# Altium PCB ET4207_DEMO.PcbDoc
Units mil, origin at the board's own origin, x right, y up, seen from the top; angles counter-clockwise.
Board outline 1908.53 x 1807.98 mil, 2 copper layers (Top Layer, Bottom Layer); 46 components, 26 nets, 115 pads, 21 vias.
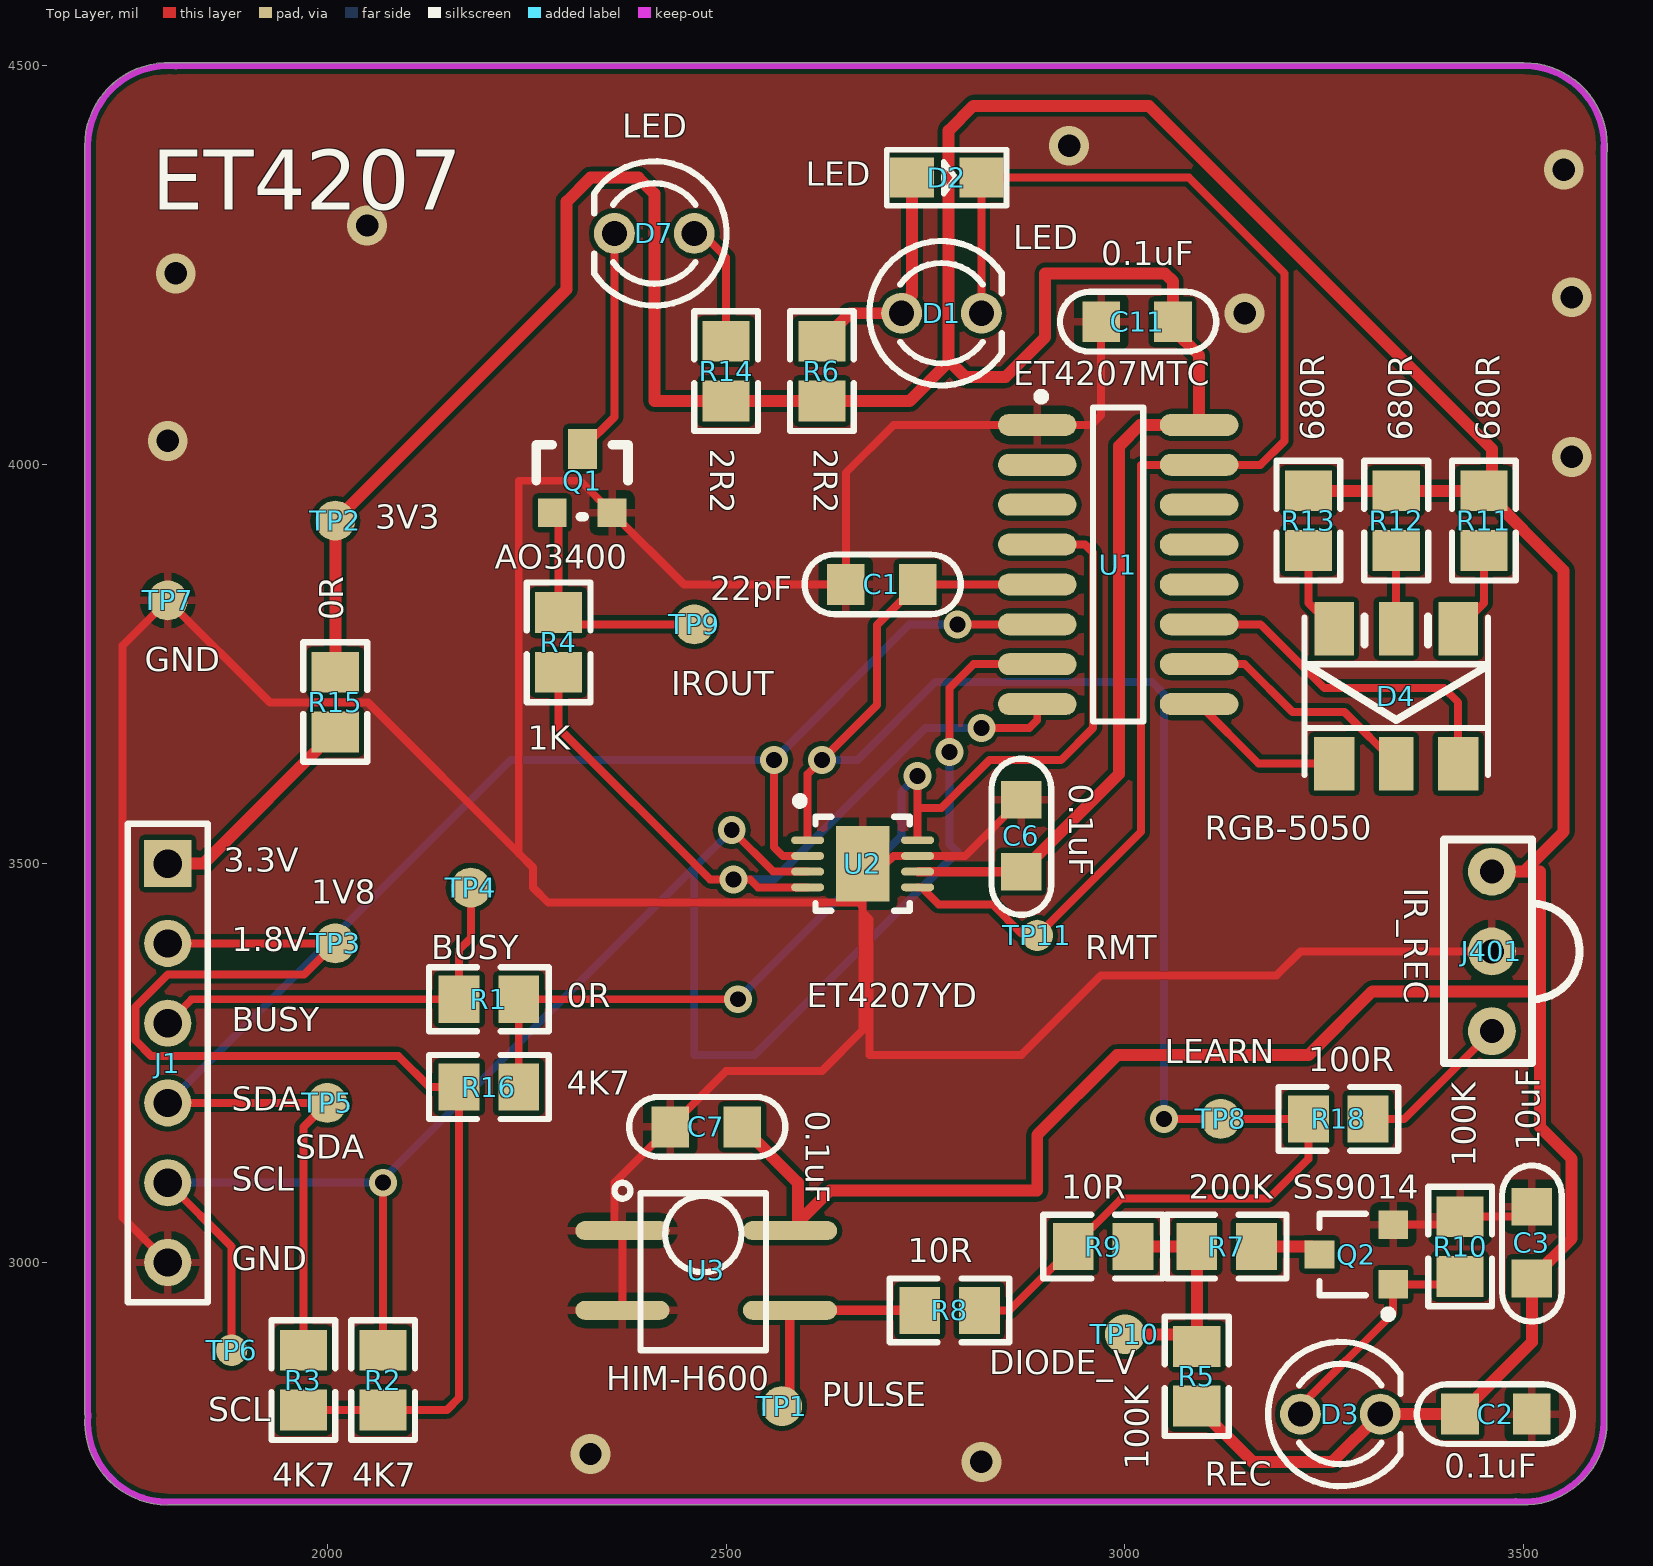
[diagram p0: Top Layer view]
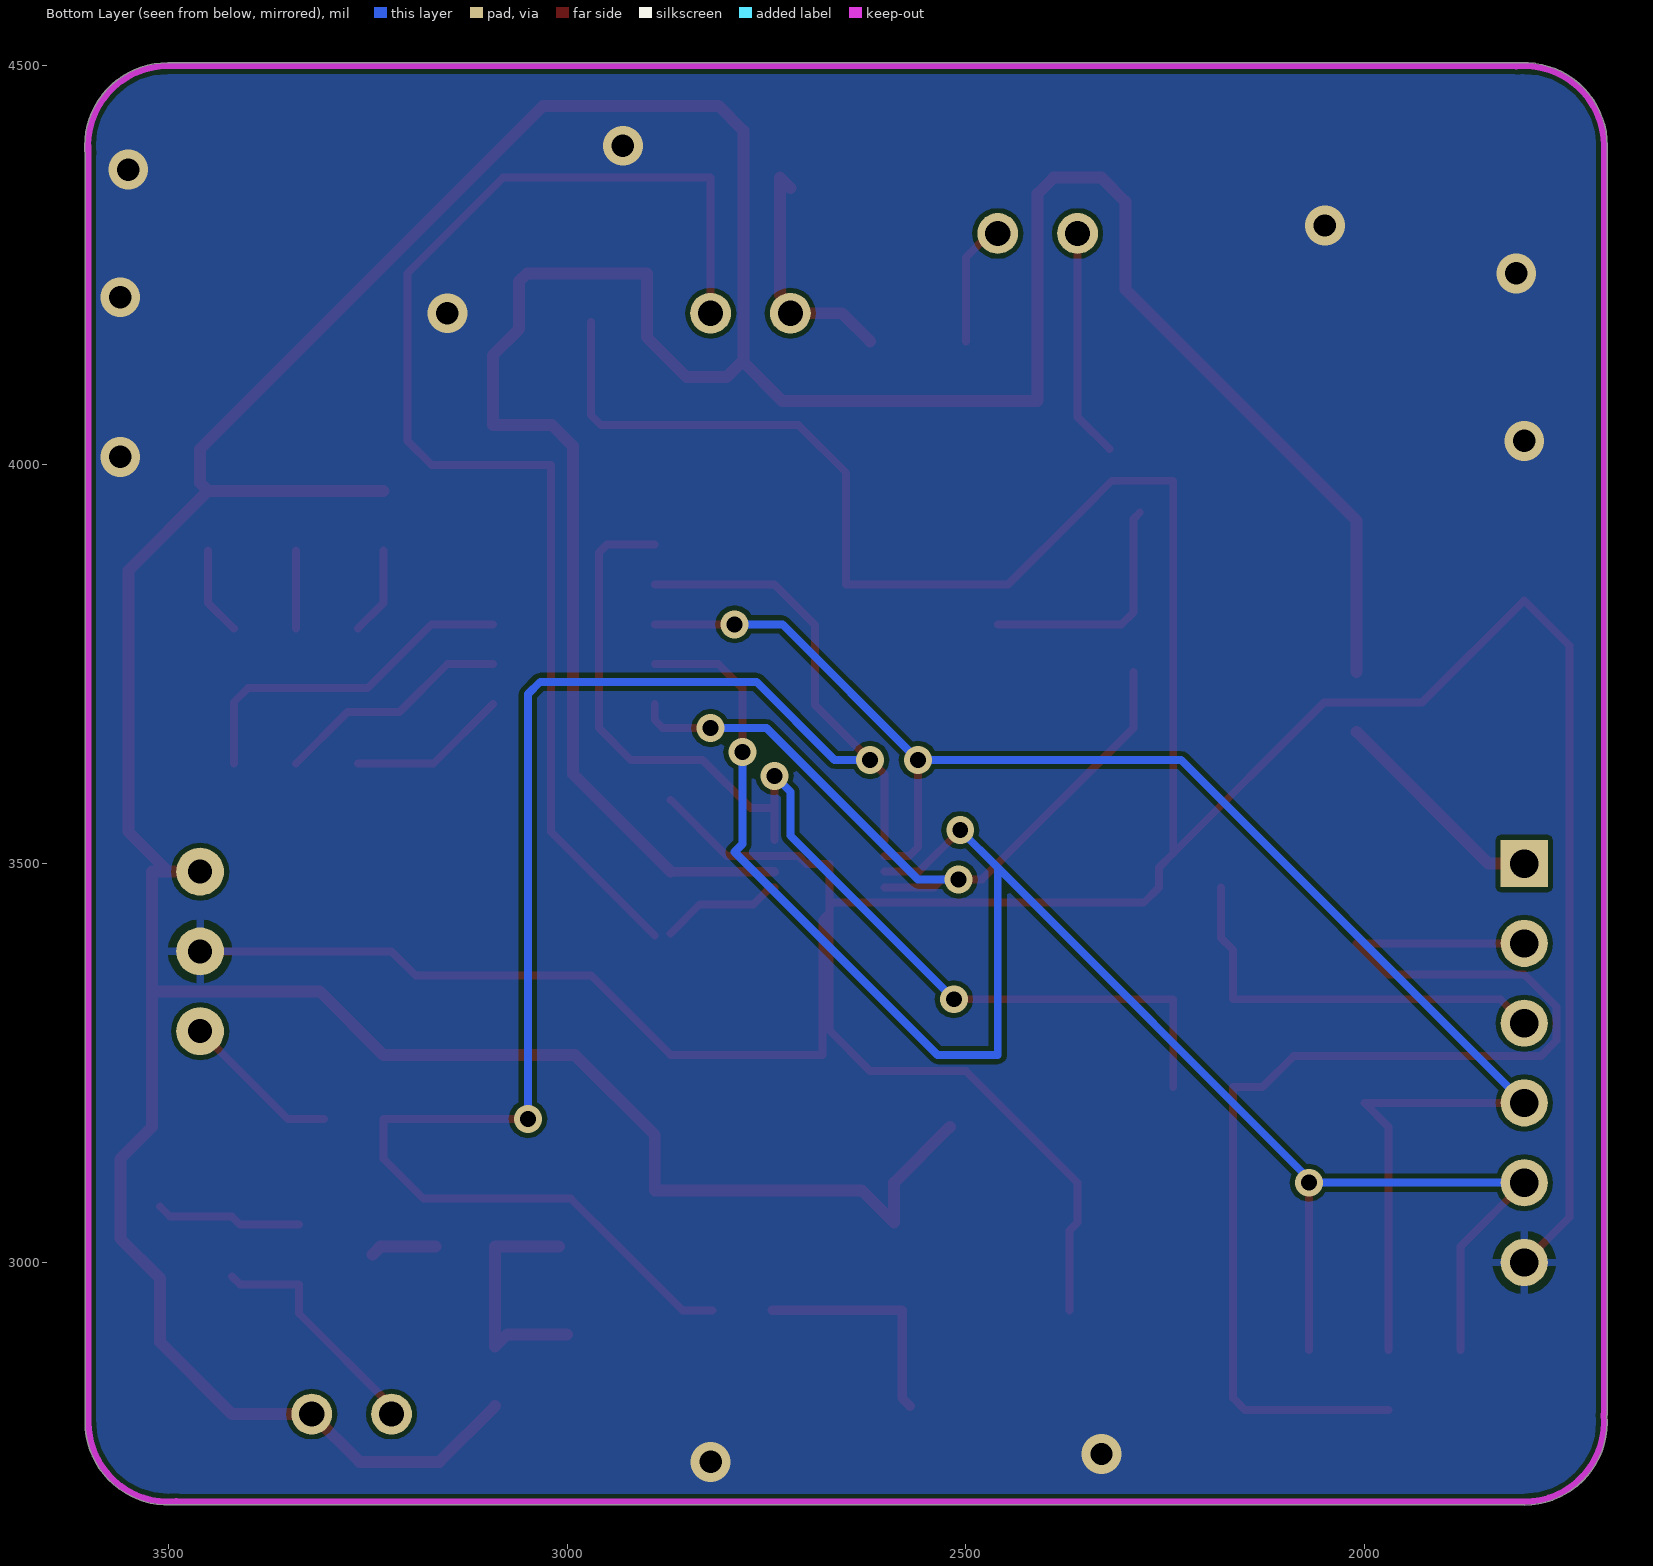
[diagram p1: Bottom Layer view, seen from below]
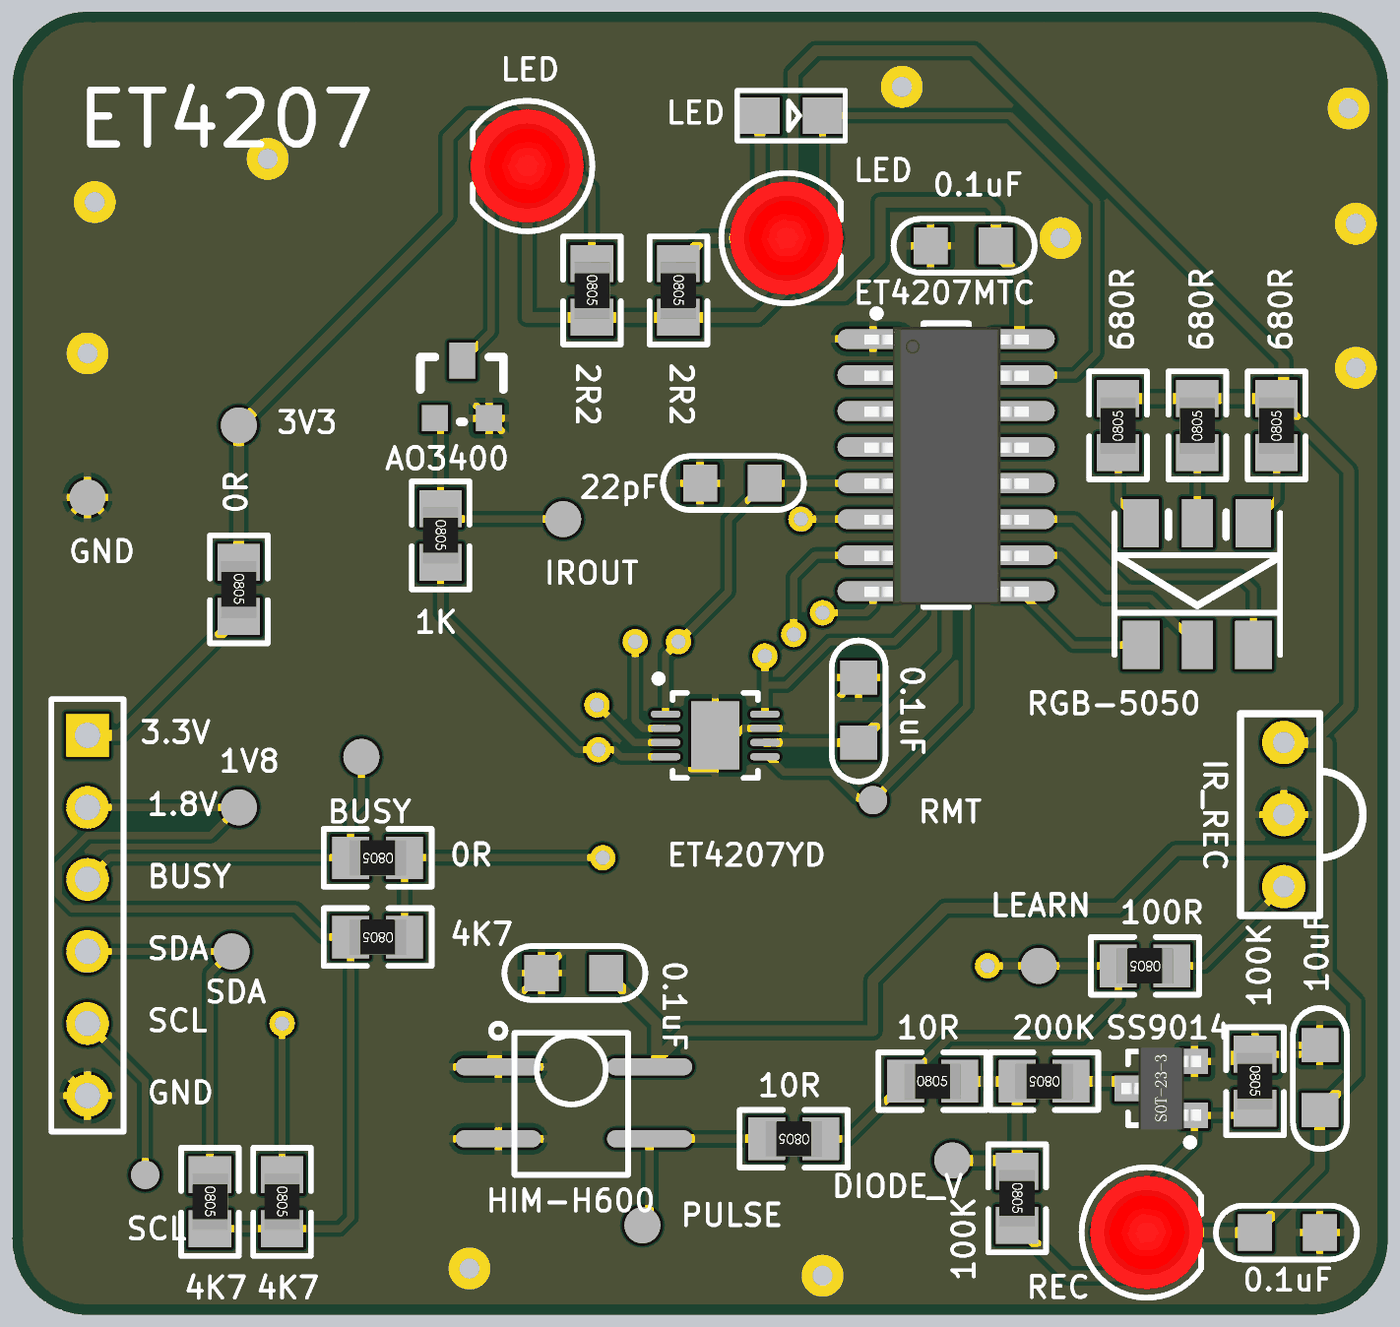
[diagram p2: 3D render of the assembled board from above, using the file's embedded part models]

## Layer stack, top to bottom
Top Solder: solder mask 0.4, Solder Resist, Dk 3.5
Top Layer: signal copper 1.4
Dielectric 1: dielectric 12.6, FR-4, Dk 4.8
Bottom Layer: signal copper 1.4
Bottom Solder: solder mask 0.4, Solder Resist, Dk 3.5

## Board outline
1800,2695.99 cw(c1800,2800) 1696.33,2808.52 cw(c1700,2810) 1696.05,2810 1696.05,4399.29 cw(c1700,4400) 1695.98,4400 cw(c1800,4400) 1803.62,4503.95 3500,4503.95 cw(c3500,4500) 3500.14,4503.95 cw(c3500.5,4499.95) 3500.5,4503.97 cw(c3500.5,4399.95) 3604.51,4399.95 cw(c3500.5,4399.95) 3604,4389.6 cw(c3600,4390) 3603.95,4389.29 3603.95,2800.71 cw(c3600,2800) 3604.01,2800 cw(c3500,2800) 3496.38,2696.05 1800.71,2696.05 cw(c1800,2700)

## Design rules (kind name [scope] priority, off if disabled: settings)
Clearance [All] p1: gap=6 ignorepadtopadclearanceinfootprint=FALSE
PolygonConnect [All] p1: connectstyle=Relief reliefconductorwidth=10 reliefentries=4 polygonreliefangle="90 Angle" airgapwidth=10
RoutingVias [All] p1: holewidth=20 width=35 viastyle="Through Hole" minholewidth=15 minwidth=25 maxholewidth=28 maxwidth=50
SolderMaskExpansion [All] p1: expansion=4
Width [All] p1: maxlimit=40 minlimit=6 preferedwidth=10
30 further rules are at their usual default settings.

## Components (designator, comment, footprint, x,y, rotation, side; value= is the part's Value field where it differs from the comment)
C1 "22pF" 0805C 2739.86,3850.73 r90 top
C2 "0.1uF" 0805C 3420.14,2809.27 r270 top
C3 "10uF" 0805C 3510.73,2980.14 r0 top
C6 "0.1uF" 0805C 2870.73,3490.14 r0 top
C7 "0.1uF" 0805C 2519.86,3170.73 r90 top
C11 "0.1uF" 0805C 3060,4180 r90 top
D1 "LED" LED_A2 2770,4190 r180 top
D2 "LED" LED-0805 2733.97,4360.41 r0 top
D3 "REC" LED_A2 3270,2810 r180 top
D4 "RGB-5050" LED-5050 3340,3710 r270 top
D7 "LED" LED_A2 2410,4290 r0 top
J1 "CON6" HDR1X6 1800,3500 r270 top
J401 "IR_REC" IR 3460,3290 r90 top
Q1 "AO3400" SOT-23 2312,3980 r0 top
Q2 "SS9014" SOT23-3 3290,3010 r90 top
R1 "0R" 0805R 2202.6,3330 r180 top
R2 "4K7" 0805R 2070,2852.6 r270 top
R3 "4K7" 0805R 1970,2852.6 r270 top
R4 "1K" 0805R 2290,3777.4 r270 top
R5 "100K" 0805R 3090,2857.4 r270 top
R6 "2R2" 0805R 2620,4117.4 r270 top
R7 "200K" 0805R 3127.4,3020 r180 top
R8 "10R" 0805R 2780,2940 r180 top
R9 "10R" 0805R 2972.6,3020 r0 top
R10 "100K" 0805R 3420,3020 r270 top
R11 "680R" 0805R 3450,3930 r90 top
R12 "680R" 0805R 3340,3930 r90 top
R13 "680R" 0805R 3230,3930 r90 top
R14 "2R2" 0805R 2500,4117.4 r270 top
R15 "0R" 0805R 2010,3702.6 r270 top
R16 "4K7" 0805R 2202.6,3220 r180 top
R18 "100R" 0805R 3267.4,3180 r180 top
TP1 "PULSE" TP-SM-C-100#1 2570,2820 r0 top
TP2 "3V3" TP-SM-C-100#1 2010,3930 r90 top
TP3 "1V8" TP-SM-C-100#1 2010,3400 r90 top
TP4 "BUSY" TP-SM-C-100#1 2180,3470 r90 top
TP5 "SDA" TP-SM-C-100#1 2000,3200 r90 top
TP6 "SCL" TP-SM-C-100#2 1880,2890 r90 top
TP7 "GND" TP-SM-C-100#1 1800,3830 r90 top
TP8 "LEARN" TP-SM-C-100#1 3120,3180 r90 top
TP9 "IROUT" TP-SM-C-100#1 2460,3800 r90 top
TP10 "DIODE_V" TP-SM-C-100#1 3000,2910 r90 top
TP11 "RMT" TP-SM-C-100#2 2890,3410 r90 top
U1 "ET4207MTC" soic-16 2991.46,3875 r0 top
U2 "ET4207YD" QFN-8 2671.1,3499.84 r0 top
U3 "HIM-H600" HIM-H600 2550,2890 r90 top

## Footprints (in the part's own frame and the unit in brackets; to place one, negate y for a bottom-side part, rotate by r counter-clockwise, add the part's x,y. Pads: shape width x height; smd on the part's side, far side on the other; paste and mask are expansions set on the pad)
0805C [mm]
  rect 1.3x1.2 smd: 1(-0.019,-0.004) 2(-0.019,2.282)
  silkscreen extent -0.97,-1.38 0.93,3.59
0805R [mm] "0805带丝印"
  rect 1.3x1.5 smd: 1(-0.95,0) 2(0.95,0)
  silkscreen extent -1.9,-1.02 1.91,1.02, body extent -1,-0.62 1,0.63, height 0.5
HDR1X6 [mm] "Connector; Header; 6 Position"
  rect 1.5x1.5 hole 0.9: 1(0,0)
  round 1.5 hole 0.9: 2(2.54,0) 3(5.08,0) 4(7.62,0) 5(10.16,0) 6(12.7,0)
  silkscreen extent -1.27,-1.27 13.97,1.27
HIM-H600 [mm]
  oval 0.6x3 smd: 1(3.81,4.572) 2(1.27,4.572) 3(1.27,-0.762) 4(3.81,-0.762)
  silkscreen extent 0,0 5.33,4.83
IR [mil]
  round 60 hole 30: 1(0,0) 2(100,0) 3(200,0)
  silkscreen extent -40,-110 240,60
LED-0805 [mm]
  rect 1.4x1.27 smd: 1(-0.025,-0.01) 2(2.185,-0.01)
  silkscreen extent -0.82,-0.9 2.99,0.88
LED-5050 [mm]
  rect 1.7x1.25 smd: 1(-2.15,1.975) 5(-2.15,-1.975)
  rect 1.7x1.3 smd: 2(2.15,1.975) 6(2.15,-1.975)
  rect 1.7x1.1 smd: 3(-2.15,0) 4(2.15,0)
  silkscreen extent -2.54,-2.92 2.5,2.92
LED_A2 [mm] "直径3MM LED"
  round 1.3 hole 0.8: 1(1.27,0) 2(-1.27,0)
  silkscreen extent -1.91,-2.3 2.3,2.3, body extent -2,-2 2,2, height 4.5
QFN-8 [mm] "QFN"
  oval 1.05x0.25 smd: 1(-1.75,0.75) 2(-1.75,0.25) 3(-1.75,-0.25) 4(-1.75,-0.75) 5(1.75,-0.75) 6(1.75,-0.25) 7(1.75,0.25) 8(1.75,0.75)
  rect 1.7x2.4 smd: 9(0,0)
  silkscreen extent -2.12,-1.5 1.5,2.12
soic-16 [mm]
  oval 2.5x0.7 smd: 1(-2.577,4.445) 2(-2.577,3.175) 3(-2.577,1.905) 4(-2.577,0.635) 5(-2.577,-0.635) 6(-2.577,-1.905) 7(-2.577,-3.175) 8(-2.577,-4.445) 9(2.577,-4.445) 10(2.577,-3.175) 11(2.577,-1.905) 12(2.577,-0.635) 13(2.577,0.635) 14(2.577,1.905) 15(2.577,3.175) 16(2.577,4.445)
  silkscreen extent -2.57,-5 0.8,5.47, body extent -2.88,-4.92 2.92,4.88, height 1.75
SOT23-3 [mm]
  rect 0.9x0.95 smd: 1(-0.95,-1.175) 2(0.95,-1.175) 3(0,1.175)
  silkscreen extent -2.03,-1.14 1.3,1.18, body extent -1.45,-1.4 1.45,1.4, height 1.2
SOT-23 [mil]
  rect 36x36 smd: 1(-30,-40) 2(45,-40)
  rect 36x50 smd: 3(8,40)
  silkscreen extent -50,-45 65,45
TP-SM-C-100#1 [mil] "Test Point, Surface Mounting, Circular, Pad Diameter 1mm"
  round 50 smd: 1(0,0)
TP-SM-C-100#2 [mil] "Test Point, Surface Mounting, Circular, Pad Diameter 1mm"
  round 39.37 smd: 1(0,0)

## Part data
C1 C2 C3 C6 C7 C11: library part "CAPACITOR NON-POL"
D1 D2 D3 D7: library part LED_3
D4: library part LED-RGB-5050, "三基色LED", LatestRevisionDate=08-Jul-2005, LatestRevisionNote="Mech Layer 1 removed.", PackageReference=LED-0, Published=8-Jun-2000, Publisher="Altium Limited"
J401: library part CON3_0
Q1: library part MOSFET_I_EN_GSD, "MOSFET N-CH 50V 200MA SOT-23", Mfr_Name="On Semi", Mfr_Part_Number=BSS138LT3G, Datasheet=http://www.onsemi.com/pub_link/Collateral/BSS138LT1-D.PDF, Distributor_Part_Number=BSS138LT3GOSCT-ND, TI_Part_No=TI-MOS-BSS138LT3G
Q2: "NPN贴片三极管", PackageDocument=Sep-1998, Code_JEDEC=TO-92A, ComponentLink1Description="Manufacturer Link", ComponentLink1URL=http://www.fairchildsemi.com/, ComponentLink2Description=Datasheet, ComponentLink2URL=http://www.fairchildsemi.com/ds/2N%2F2N3904.pdf, DatasheetDocument=1997, LatestRevisionDate=15-Jan-2003, LatestRevisionNote="PCB Footprint 'BCY-W3/D4.7' replaced", PackageReference=TO-92A, Published=8-Jun-2000, Publisher="Altium Limited"
R1 R2 R3 R4 R5 R6 R7 R8 R9 R10 R11 R12 R13 R14 R15 R16 R18: library part RESISTOR, MODULE=CPU
TP1 TP2 TP3 TP4 TP5 TP6 TP7 TP8 TP9 TP10 TP11: library part TP-SM, "Test Point, Surface Mount, Circular, Pad Diameter 1 mm"
U3: library part LPC111x_7, DEVICE=ET4003YD, MODULE=CPU

## Via types
v1: diameter 35, hole 20, Top Layer to Bottom Layer, 11 vias
v2: diameter 50, hole 28, Top Layer to Bottom Layer, 10 vias

## Nets (pads, with @x,y where several pads share a name; then routed paths per layer and width w, separated by ;. In a path a pad name is that pad's centre, name@x,y a point inside that pad or via, vN(x,y) a via of type N, cw(c..) or ccw(c..) an arc to the next point about the centre after c; other vN are vias at no path point)
BUSY: R1.1 R16.1 U1.4 U2.8 | length 1394.5
  Top Layer w10: R16.1 R1.1 v1(2515,3330) ; U2.8 2740,3569.68 ; v1(2740,3610) 2740,3569.68 ; U1.4 2950,3900 2960,3890 2960,3670 2920,3630 2830,3630 2769.68,3569.68 2740,3569.68
  Bottom Layer w10: v1(2515,3330) 2720,3535 2720,3590 v1(2740,3610)
BUSY_OUT: J1.3 R1.2 TP4.1 | length 523.8
  Top Layer w10: J1.3 1830,3330 R1.2 2165.2,3392 2180,3406.8 TP4.1
GND: C1.2 C2.2 C3.2 C6.2 C7.2 C11.2 J1.6 J401.2 Q1.2 Q2.2 R10.1 TP7.1 U1.1 U2.7 U2.9 U3.1 U3.2 | length 5654
  Top Layer w10: J1.6 1743.47,3056.53 1743.47,3773.47 TP7.1 1928,3702 2051,3702 2240,3513 ; U3.2 U3.1 2360,3050 2360,3100 C7.2 2500,3240 2620,3240 2671.1,3291.1 2671.1,3438.9 ; C6.2 2799.69,3509.69 U2.7 2709.84,3509.69 2700,3499.84 U2.9 2671.1,3446.4 ; C11.2 2970.14,4062.5 2957.64,4050 U1.1 2710,4050 2650,3990 C1.2 2447,3850 Q1.2 2317,3980 2240,3980 2240,3513 ; Q2.2 3410,3047.4 R10.1 3497.4,3057.4 C3.2 ; J401.2 3220,3390 3190,3360 2970,3360 2870,3260 2680,3260 2680,3430 2671.1,3438.9 ; 2240,3513 2258,3495 2258,3470 2277,3451 2666.5,3451 2671.1,3446.4 ; 2671.1,3438.9 2671.1,3446.4
  other v2: 2820,2750 2330,2760 3560,4010 1800,4030 3150,4190 3560,4210 1810,4240 2050,4300 3550,4370 2930,4400
IROUT: R4.2 U1.8 U2.4 | length 948.8
  Top Layer w10: R4.2 2290,3670 2480,3480 v1(2509,3480) 2530.31,3480 2540,3470.31 U2.4 ; v1(2820,3670) 2880,3670 2890,3680 U1.8
  Bottom Layer w10: v1(2509,3480) 2560,3480 2750,3670 v1(2820,3670)
LEARN: C1.1 R8.1 R9.1 R18.2 TP8.1 U1.5 U2.1 | length 2258.5
  Top Layer w10: U2.1 2602.2,3612.2 v1(2620,3630) 2689,3699 2689,3799 C1.1 U1.5 ; R8.1 2855.2,2940 R9.1 2995.2,3080 3180,3080 3230,3130 R18.2 TP8.1 v1(3049,3180)
  Bottom Layer w10: v1(2620,3630) 2664.5,3630 2762.5,3728 3033.5,3728 3049,3712.5 v1(3049,3180)
LED_B: D4.6 U1.9 | length 200.2
  Top Layer w10: U1.9 3167.56,3625.35 D4.6
LED_G: D4.4 U1.10 | length 298.7
  Top Layer w10: U1.10 3150,3750 3210,3690 3275.35,3690 D4.4
LED_R: D4.2 U1.11 | length 442.2
  Top Layer w10: U1.11 3170,3800 3250,3720 3400,3720 3417.76,3702.24 D4.2
NetD1_1: D1.1 D2.1 R6.1 | length 312.5
  Top Layer w15: R6.1 2655.2,4190 D1.1@2710,4190 ; D1.1 D1.1@2710,4190 ; D2.1@2720,4347.01 D2.1 2732.99,4212.99 D1.1@2710,4190
NetD3_1: D3.1 Q2.1 R10.2 | length 298.6
  Top Layer w10: D3.1 3220,2820 3336.26,2936.26 Q2.1 3410,2972.6 R10.2
NetD4_1: D4.1 R11.1 | length 111.3
  Top Layer w10: D4.1 3450,3826.89 R11.1
NetD4_3: D4.3 R12.1 | length 98
  Top Layer w10: D4.3 R12.1
NetD4_5: D4.5 R13.1 | length 111.3
  Top Layer w10: R13.1 3230,3826.89 D4.5
NetD7_1: D7.1 R14.1 | length 147.6
  Top Layer w10: D7.1@2470,4290 2500,4260 R14.1
NetD7_2: D7.2 Q1.3 | length 286.6
  Top Layer w10: Q1.3 2360,4060 D7.2
NetJ1_1: J1.1 R15.2 | length 278.4
  Top Layer w15: J1.1 1844.8,3500 R15.2
NetJ401_1: J401.1 R18.1 | length 200.8
  Top Layer w10: R18.1 3350,3180 J401.1
NetQ1_1: Q1.1 R4.1 TP9.1 | length 304.6
  Top Layer w10: Q1.1 2290,3932 R4.1 2304.8,3800 TP9.1
NetQ2_3: Q2.3 R7.1 | length 83.1
  Top Layer w15: R7.1 3233.74,3020 Q2.3
NetR5_1: R5.1 R7.2 R9.2 TP10.1 | length 301.5
  Top Layer w15: TP10.1 3074.8,2910 R5.1 R7.2 R9.2
NetR8_2: R8.2 TP1.1 U3.3 | length 286.7
  Top Layer w12: TP1.1 2580,2830 U3.3 R8.2
RMT: D1.2 D2.2 TP11.1 U1.15 U2.5 | length 1799.9
  Top Layer w10: U2.5 2745,3470.31 2766.28,3449.04 2833.46,3449.04 2870,3412.5 ; D1.2 D2.2 3080,4360 3200,4240 3200,4030 3170,4000 U1.15 3020,4000 3020,3540 TP11.1
SCL: J1.5 R2.1 TP6.1 U1.7 U2.3 | length 2463.9
  Top Layer w10: J1.5 1880,3020 TP6.1 ; R2.1 v1(2070,3100) ; v1(2507,3542) 2559,3490 U2.3 ; v1(2780,3640) 2780,3720 2810,3750 U1.7
  Bottom Layer w10: J1.5 v1(2070,3100) ; v1@2067.5,3102.5 2460,3495 ; v1(2507,3542) 2460,3495 ; v1(2780,3640) 2780,3524.5 2790,3514.5 2535.5,3260 2460,3260 2460,3495
SDA: J1.4 R3.1 TP5.1 U1.6 U2.2 | length 2017
  Top Layer w10: J1.4 TP5.1 1970,3170 R3.1 ; v1(2560,3630) 2560,3520.69 2571,3509.69 U2.2 ; v1(2790,3800) U1.6
  Bottom Layer w10: J1.4 2230,3630 v1(2560,3630) 2730,3800 v1(2790,3800)
VDD_1V8: J1.2 R2.2 R3.2 R16.2 TP3.1 | length 1556.5
  Top Layer w10: J1.2 TP3.1 1971,3361 1800,3361 1759.47,3320.47 1759.47,3278.53 1779,3259 2089,3259 2128,3220 R16.2 2165.2,2830.39 2150,2815.2 R2.2 R3.2
VDD_3V3: C2.1 C3.1 C6.1 C7.1 C11.1 D3.2 J401.3 R5.2 R6.2 R11.2 R12.2 R13.2 R14.2 R15.1 TP2.1 U2.6 U3.4 | length 7320.8
  Top Layer w12: U2.6 C6.1
  Top Layer w15: R15.1 TP2.1 2300,4220 2300,4330 2330,4360 2390,4360 2410,4340 2410,4080 R14.2 R6.2 2730,4080 2778.94,4128.94 ; C7.1 2590,3100 2590,3050 2630,3090 2890,3090 2890,3160 2990,3260 3230,3260 3310,3340 3520,3340 ; C6.1 2992.61,3612.61 2992.61,4023.61 3019,4050 3092.91,4050 3092.91,4137.22 3060.14,4170 C11.1 3060.14,4229.86 3050,4240 2900,4240 2900,4160 2850,4110 2800,4110 2780,4130 2778.94,4128.94 ; R5.2 3160,2750 3260,2750 D3.2 C2.1 3510,2900 C3.1 3560,3030 3560,3130 3520,3170 3520,3340 ; R13.2 R12.2 R11.2 ; J401.3 3500,3490 ; 2778.94,4128.94 2778.94,4418.94 2810,4450 3030,4450 3460,4020 3460,3977.4 R11.2 ; R11.2 3550,3867.4 3550,3540 3500,3490 ; 3500,3490 3520,3490 3520,3340
pads on no net: U1.2 U1.3 U1.12 U1.13 U1.14 U1.16

## Polygon pours and split planes (outlines as drawn)
GND on Top Layer "GND_L01_P000" (solid, pour order 0): 1700,4500 1700,2700 3600,2700 3600,4500
GND on Bottom Layer "GND_L02_P002" (solid, remove dead copper, pour order 2): 1690,4510 1690,2700 1700,2690 1720,2710 3600,2710 3600,4500 3610,4510

## Keep-outs
Keep-Out Layer:
  lines w7.87: 1700,2810 1700,4400 ; 1800,2700 3500,2700 ; 1800,4500 3500,4500 ; 3600,2800 3600,4400
  lines w8: -1329.5,2529.95 ccw(c-1230,2520) -1230,2420 ; -1259.5,2579.95 ccw(c-1160,2570) -1160,2470 ; -1079.5,2279.95 ccw(c-980,2270) -980,2170 ; 1700,4400 cw(c1800,4400) 1809.95,4499.5 ; 1700.5,2809.95 ccw(c1800,2800) 1800,2700 ; 3490.05,2700.5 ccw(c3500,2800) 3600,2800 ; 3500.5,4499.95 cw(c3500.5,4399.95) 3600,4390

## Silkscreen, mask and mechanical layers (free items; w line width, h text height)
Top Overlay:
  text "ET4207" at 1780,4320 h75
  text "3.3V" at 1870,3490 h30
  text "1.8V" at 1880,3390 h30
  text "BUSY" at 1880,3290 h30
  text "SDA" at 1880,3190 h30
  text "SCL" at 1880,3090 h30
  text "GND" at 1880,2990 h30